# Altium PCB 2224_BuzzerWireGame.PcbDoc (part 1 of 2)
Units mm, origin at the board's own origin, x right, y up, seen from the top; angles counter-clockwise.
Board outline 125.2 x 82 mm, 2 copper layers (Top Layer, Bottom Layer), stack 1.586 mm thick; 102 components, 84 nets, 371 pads, 115 vias.
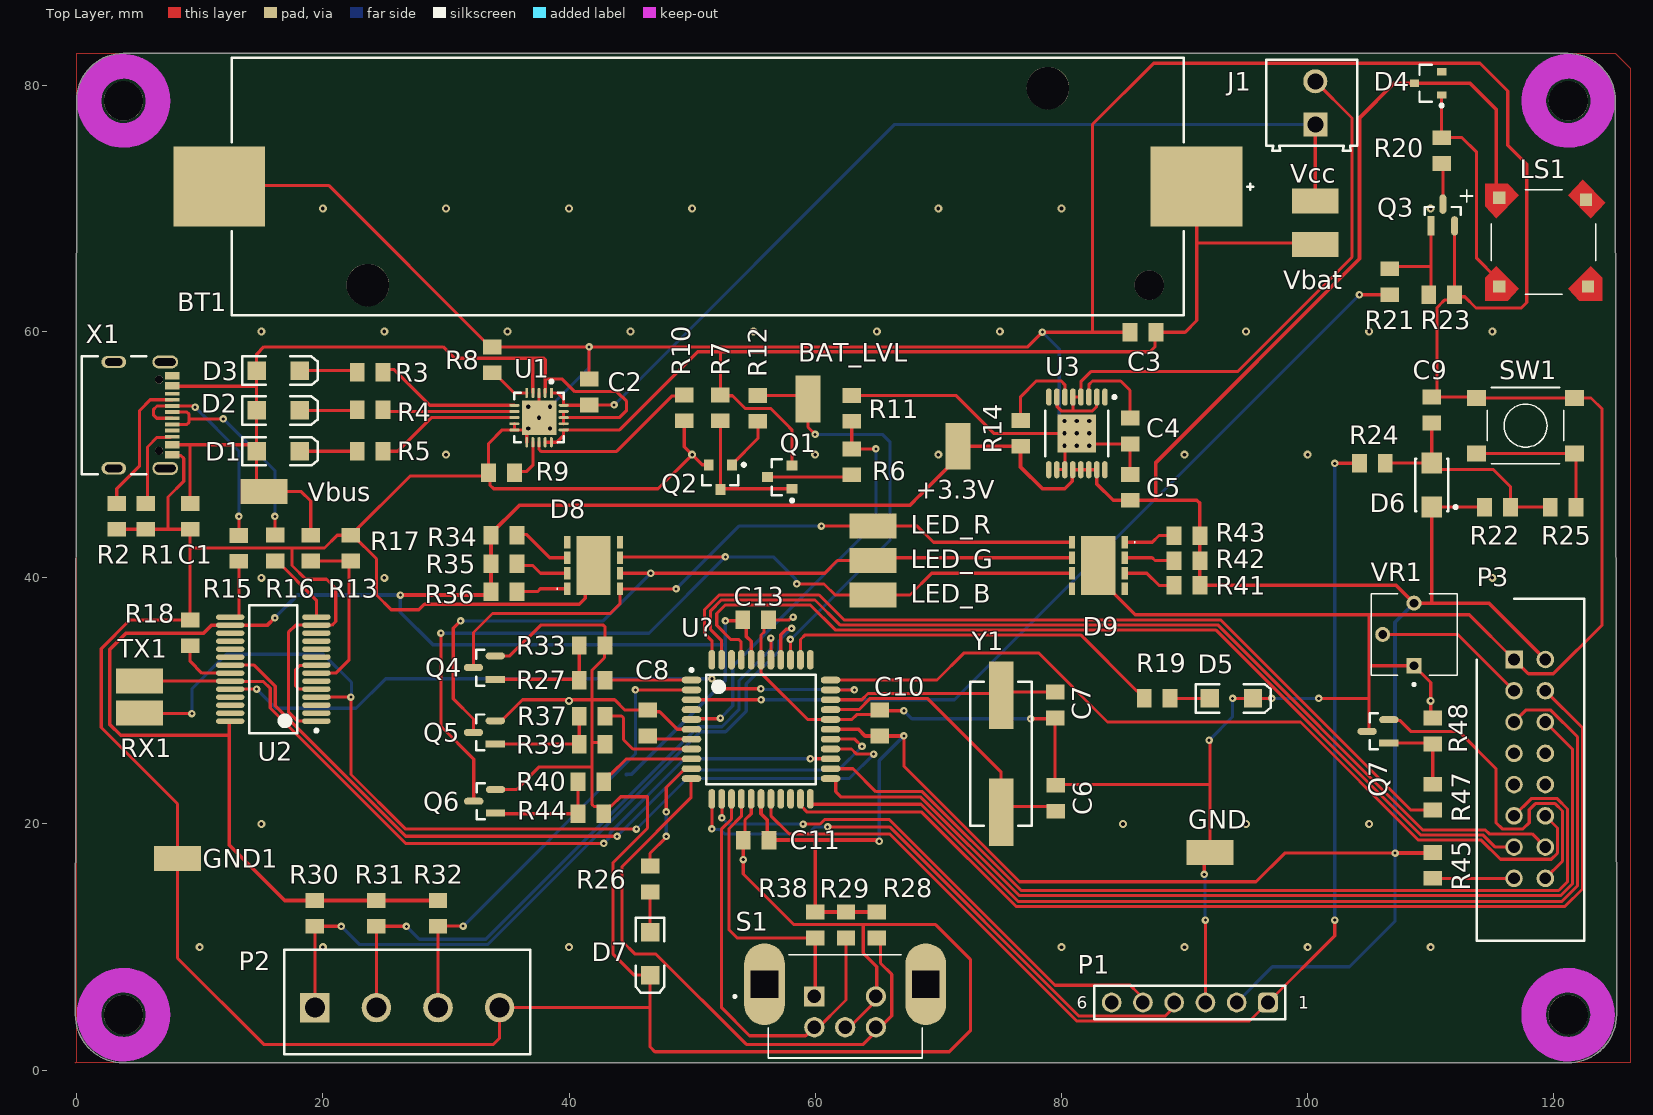
[diagram p0: Top Layer view]
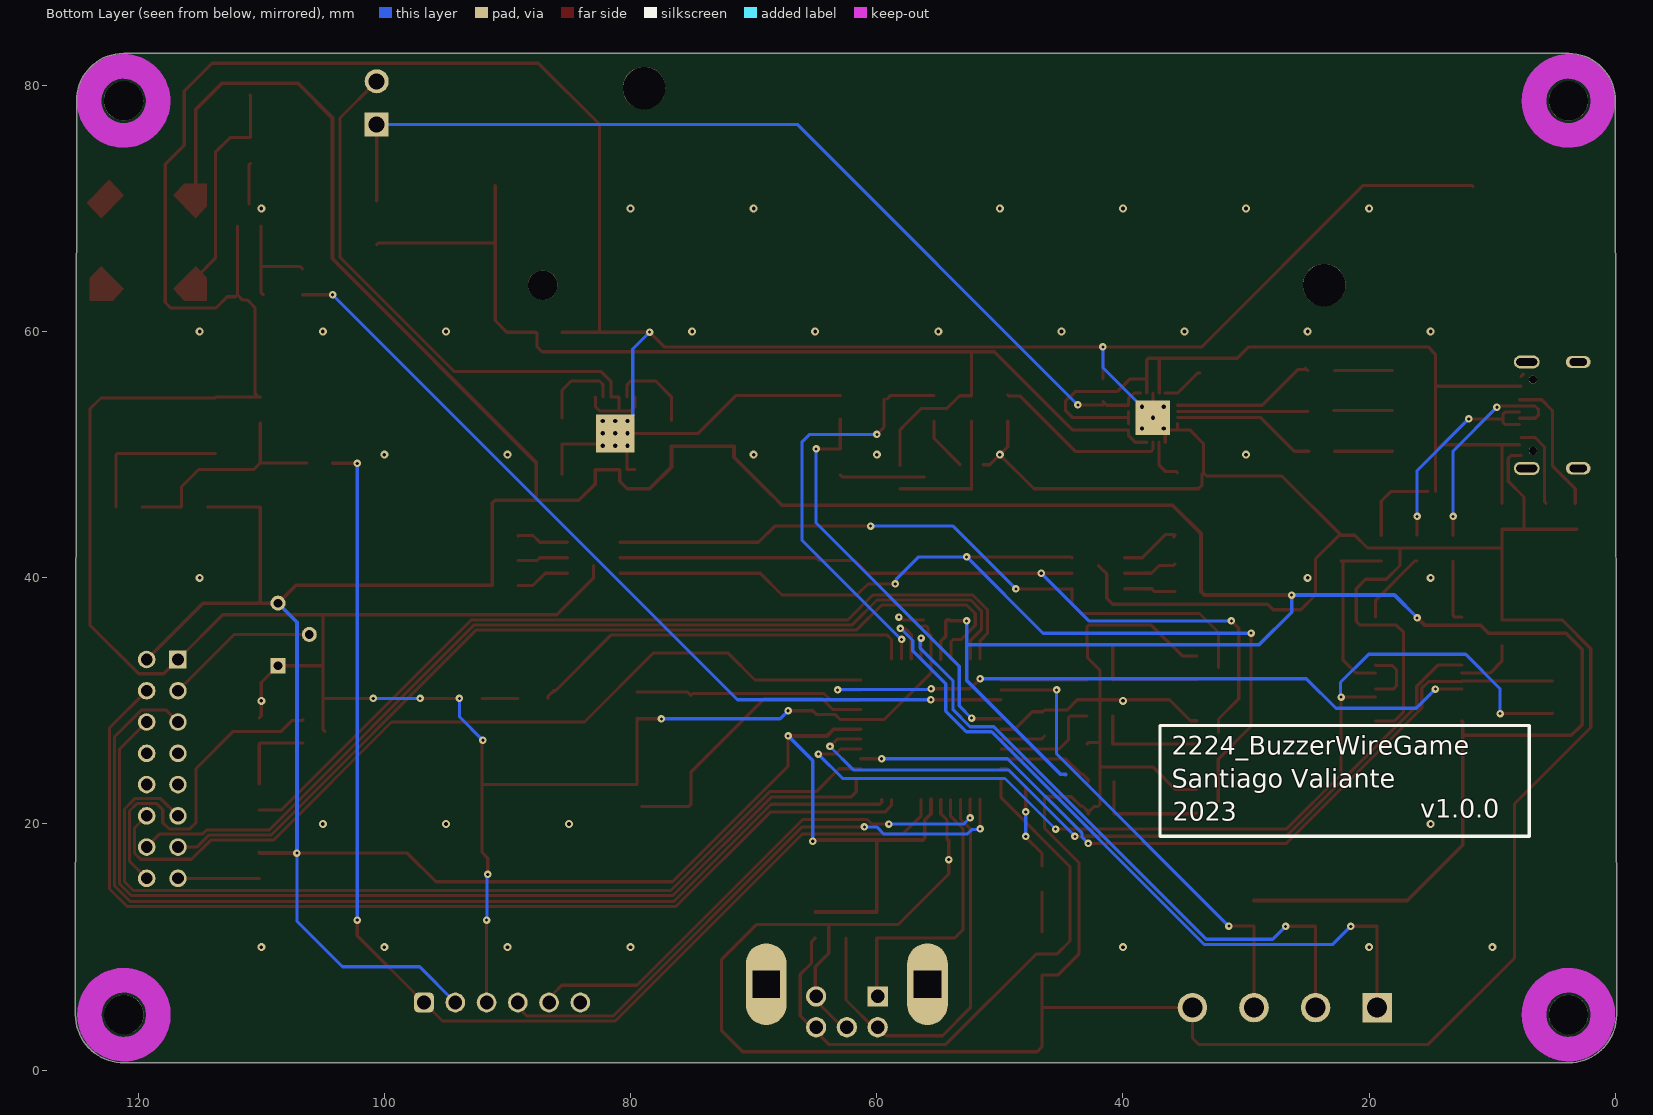
[diagram p1: Bottom Layer view, seen from below]

## Layer stack, top to bottom
Top Solder: solder mask 0.0102, Solder Resist, Dk 3.5
Top Layer: signal copper 0.018
Dielectric1: core 1.55, FR-4, Dk 4.8
Bottom Layer: signal copper 0.018
Bottom Solder: solder mask 0.0102, Solder Resist, Dk 3.5

## Board outline
3.81,0.6 cw(c3.81,4.51) -0.1,4.51 0,78.74 cw(c3.835,78.765) 3.81,82.6 121.179,82.6 cw(c121.16,78.76) 125,78.74 125.1,4.526 cw(c121.158,4.542) 121.142,0.6

## Design rules (kind name [scope] priority, off if disabled: settings)
BoardOutlineClearance [All] p1: gap=0.25 ignorepadtopadclearanceinfootprint=FALSE except(0: Arc-SplitContinuation Track-SplitContinuation SMDPad-SplitContinuation THPad-SplitContinuation Via-SplitContinuation Fill-SplitContinuation Poly-SplitContinuation Region-SplitContinuation Text-SplitContinuation)
Clearance Clearance-xPP-xTP-xTT [All] p1: gap=0.151 ignorepadtopadclearanceinfootprint=FALSE
ComponentClearance [All] p1: gap=0.25 collisioncheckmode=3 verticalgap=0.25 showdistances=FALSE
DiffPairsRouting [All] p1: maxlimit=0.25 minlimit=0.25 mostfreqgap=0.25 toplayer_minwidth=0.381 toplayer_maxwidth=0.381 toplayer_prefwidth=0.381 bottomlayer_minwidth=0.381 bottomlayer_maxwidth=0.381 bottomlayer_prefwidth=0.381 maxuncoupledlength=12.5
Height [All] p1: minheight=0 maxheight=25 prefheight=12.5
HoleSize HoleSize-PTH [All] p1: absolutevalues=TRUE maxlimit=10 minlimit=0.25 maxpercent=80.000 minpercent=20.000
HoleToHoleClearance [All] p1: gap=0.35 allowstackedmicrovias=TRUE
MinimumAnnularRing "Minimum IAR  >0.45mm" [((ObjectKind = 'Pad') OR (ObjectKind = 'Via')) And (Layer = 'MultiLayer') And (HoleDiameter > AsMM(0.45))] p1: minimumring=0.175 // minimum inner annular ring for pads > 0.45mm finished hole size
MinimumAnnularRing "Minimum IAR <=0.45mm" [((ObjectKind = 'Pad') OR (ObjectKind = 'Via')) And (Layer = 'MultiLayer') And (HoleDiameter <= AsMM(0.45))] p2: minimumring=0.175 // minimum inner annular ring for pads <= 0.45mm finished hole size
MinimumSolderMaskSliver [All] p1: minsoldermaskwidth=0.08
PasteMaskExpansion [All] p1: expansion=-0.025
PlaneClearance PlaneClearance-IPI [All] p1: clearance=0.25
PlaneConnect [All] p1: planeconnectstyle=Relief reliefexpansion=0.175 reliefentries=4 reliefconductorwidth=0.2 reliefairgap=0.2
PolygonConnect PolygonConnect-xTW [All] p1: connectstyle=Relief reliefconductorwidth=0.2 reliefentries=4 polygonreliefangle="90 Angle" airgapwidth=0.2
RoomDefinition Alimentation [InComponentClass('Alimentation')] p1: confinementstyle=ConfineIn formatcopy=TRUE lockcomponents=FALSE outline -219.71,-227.838 388.112,-227.838 388.112,287.02 -219.71,287.02
RoomDefinition uC_IO [InComponentClass('uC_IO')] p2: confinementstyle=ConfineIn formatcopy=TRUE lockcomponents=FALSE outline -250,-250 387.604,-250 387.604,279.654 -250,279.654
RoutingCorners [All] p1: cornerstyle=45-Degree minsetback=2.5 maxsetback=2.5
RoutingVias RoutingViasES [All] p1: holewidth=0.25 width=0.61 viastyle="Through Hole" minholewidth=0.25 minwidth=0.61 maxholewidth=0.45 maxwidth=0.8 // finishet hole size <= 0.45mm
SilkToSilkClearance [All] p1: silktosilkclearance=0.2
SilkToSolderMaskClearance SilkscreenOverComponentPads [IsPad] p1: minsilkscreentomaskgap=0 clearancetoexposedcopper=TRUE
SolderMaskExpansion [All] p1: expansion=0 istentingtop=FALSE
UnRoutedNet [All] p1: checkbadconnections=TRUE
Width Width-xTW [All] p1: maxlimit=1.5 minlimit=0.254 preferedwidth=0.254 minimp=50.000000 maximp=50.000000 favimp=50.000000
17 further rules are at their usual default settings.

## Classes and differential pairs
component class uC_IO: C6 C7 C8 C9 C10 C11 C13 D4 D5 D6 D7 D8 D9 LED_B LED_G LED_R LS1 P1 P2 P3 Q3 Q4 Q5 Q6 Q7 R19 R20 R21 R22 R23 R24 R25 R26 R27 R28 R29 R30 R31 R32 R33 R34 R35 R36 R37 R38 R39 R40 R41 R42 R43 R44 R45 R47 R48 S1 SW1 U? VR1 Y1
component class Alimentation: +3.3V BAT_LVL BT1 C1 C2 C3 C4 C5 D1 D2 D3 GND GND1 J1 Q1 Q2 R1 R2 R3 R4 R5 R6 R7 R8 R9 R10 R11 R12 R13 R14 R15 R16 R17 R18 RX1 TX1 U1 U2 U3 Vbat Vbus Vcc X1

## Components (designator, comment, footprint, x,y, rotation, side; value= is the part's Value field where it differs from the comment)
+3.3V "3.3V" KSTN-5019_V 71.602,50.682 r90 top
BAT_LVL "Vbat" KSTN-5019_V 59.41,54.529 r270 top
BT1 "1042P" FP-1042P-MFG 51.276,71.781 r0 top
C1 "4,7uF" CAP_0805 9.222,44.989 r90 top
C2 "4,7uF" CAP_0805 41.63,55.09 r270 top
C3 "4,7uF" CAP_0805 86.622,59.95 r0 top
C4 "4.7uF, 35V" CAP_0805 85.572,51.922 r270 top
C5 "6.8uF, 10V" CAP_0805 85.572,47.35 r90 top
C6 "22pF, 10V" CAP_0805 79.539,22.089 r270 top value=22pF
C7 "22pF, 10V" CAP_0805 79.482,29.662 r90 top value=22pF
C8 "10uF, 10V" CAP_0805 46.38,28.2 r90 top value=10uF
C9 "100nF, 50V" CAP_0805 110.084,53.629 r90 top
C10 "100nF, 50V" CAP_0805 65.252,28.2 r90 top
C11 "100nF, 50V" CAP_0805 55.204,18.694 r180 top
C13 "100nF, 50V" CAP_0805 55.16,36.582 r0 top
D1 "LED R" 3.2X1.6X1.1 16.373,50.284 r0 top
D2 "LED G" 3.2X1.6X1.1 16.373,53.593 r0 top
D3 "LED B" 3.2X1.6X1.1 16.373,56.828 r0 top
D4 "BAS16" INF-SOT23_L 109.786,80.164 r180 top
D5 "LED R" 3.2X1.6X1.1 93.811,30.201 r0 top
D6 "SS14-E3/5AT" VISH-DO-214AC-2_V 110.084,47.533 r270 top
D7 "LED G" 3.2X1.6X1.1 46.58,9.475 r270 top
D8 "XMLDCL-00-R250-00C5AAA02" XMLDCL00R25000C5AAA02 42,41 r180 top
D9 "XMLDCL-00-R250-00C5AAA02" XMLDCL00R25000C5AAA02 83,41 r0 top
GND "Vbat" KSTN-5019_V 92.061,17.684 r0 top
GND1 "Vbat" KSTN-5019_V 8.2,17.2 r0 top
J1 "691214110002" 691214110002 100.322,78.584 r90 top
LED_B "Vbat" KSTN-5019_V 64.7,38.6 r180 top
LED_G "Vbat" KSTN-5019_V 64.7,41.4 r180 top
LED_R "Vbat" KSTN-5019_V 64.7,44.2 r180 top
LS1 "Speaker" XDCR_SMTB-0827-TW-R 119.17,67.266 r0 top
P1 "61300611121" 61300611121 90.43,5.5 r180 top
P2 "691311700004" 691311700004 26.858,5.536 r0 top
P3 "Header 16" SHDR16W77P254_2X8_2764X859X1004P 116.767,33.364 r270 top
Q1 "NVR1P02T1G" ONSC-SOT-23-3-318-08_V 57.124,48.179 r180 top
Q2 "BSS138LT1G" ONSC-SOT-23-3-318-08_V 52.298,48.179 r270 top
Q3 "IRLML2402" FP-Micro3-IPC_B 110.986,69.471 r90 top
Q4 "IRLML2402" FP-Micro3-IPC_B 33.125,32.706 r180 top
Q5 "IRLML2402" FP-Micro3-IPC_B 33.125,27.434 r180 top
Q6 "IRLML2402" FP-Micro3-IPC_B 33.145,21.85 r180 top
Q7 "IRLML2402" FP-Micro3-IPC_B 105.714,27.522 r180 top
R1 "5K1" RES_0805 5.626,44.994 r90 top
R2 "5K1" RES_0805 3.257,44.994 r90 top
R3 "360R" RES_0805 23.85,56.704 r0 top
R4 "360R" RES_0805 23.85,53.664 r180 top
R5 "620R" RES_0805 23.85,50.284 r0 top
R6 "39K" RES_0805 62.966,49.415 r270 top
R7 "36K" RES_0805 52.298,53.801 r90 top value=39K
R8 "10K" RES_0805 33.756,57.698 r270 top value=10k
R9 "5K6" RES_0805 34.516,48.52 r0 top
R10 "2K2" RES_0805 49.362,53.801 r90 top
R11 "39K" RES_0805 62.966,53.767 r270 top
R12 "270R" RES_0805 55.346,53.767 r270 top value=270
R13 "10K" RES_0805 19.024,42.408 r90 top value=10k
R14 "100k" RES_0805 76.682,51.732 r90 top
R15 "24R" RES_0805 13.182,42.39 r270 top
R16 "24R" RES_0805 16.132,42.424 r270 top
R17 "20K" RES_0805 22.284,42.408 r270 top value=20k
R18 "1K" RES_0805 9.222,35.532 r270 top value=1k
R19 "620R" RES_0805 87.771,30.201 r180 top
R20 "150R" RES_0805 110.886,74.705 r270 top value=0R
R21 "200R" RES_0805 106.654,64.048 r90 top
R22 "10k" RES_0805 115.418,45.743 r180 top
R23 "100K" RES_0805 110.886,62.998 r0 top
R24 "1k" RES_0805 105.258,49.311 r180 top
R25 "100R" RES_0805 120.752,45.743 r180 top
R26 "360R" RES_0805 46.58,15.529 r90 top
R27 "200R" RES_0805 41.884,31.692 r0 top
R28 "10K" RES_0805 65,11.8 r90 top
R29 "10K" RES_0805 62.5,11.8 r90 top
R30 "10K" RES_0805 19.358,12.74 r90 top
R31 "10K" RES_0805 24.358,12.74 r90 top
R32 "10K" RES_0805 29.358,12.74 r90 top
R33 "100K" RES_0805 41.884,34.5 r0 top
R34 "2R" RES_0805 34.716,43.44 r0 top
R35 "3.3R" RES_0805 34.716,41.13 r0 top
R36 "6R" RES_0805 34.716,38.88 r0 top
R37 "200R" RES_0805 41.884,28.77 r0 top
R38 "10K" RES_0805 60,11.8 r90 top
R39 "100K" RES_0805 41.884,26.484 r0 top
R40 "200R" RES_0805 41.771,23.449 r0 top
R41 "2R" RES_0805 90.198,39.388 r180 top
R42 "3.3R" RES_0805 90.198,41.4 r180 top
R43 "6R" RES_0805 90.198,43.432 r180 top
R44 "100K" RES_0805 41.771,20.834 r0 top
R45 "15R" RES_0805 110.163,16.634 r90 top
R47 "200R" RES_0805 110.163,22.188 r270 top
R48 "100K" RES_0805 110.163,27.556 r90 top
RX1 "Vbat" KSTN-5019_V 5.118,29.007 r0 top
S1 "PEC12R-2220F-S0024" XDCR_PEC12R-2220F-S0024 62.43,3.491 r0 top
SW1 "430182043816" 430182043816 117.704,52.359 r0 top
TX1 "Vbat" KSTN-5019_V 5.118,31.607 r180 top
U1 "MCP73871T-2CCI/ML" MICROCHIP_C04V2 37.566,53.013 r270 top
U2 "CY7C64225-28PVXCT" CYP-PVX28_M 15.976,32.582 r180 top
U3 "MAX1793EUE33+" TSOP65P640X110_HS-17N 81.251,51.732 r270 top
U? "PIC32MX130F064D-I/PT" MCHP-TQFP-PT44_N 55.6,27.692 r0 top
Vbat "Vbat" KSTN-5019_V 100.622,67.062 r0 top
Vbus "Vbat" KSTN-5019_V 15.214,46.996 r0 top (schematic designator Vin)
Vcc "Vbat" KSTN-5019_V 100.622,70.618 r180 top
VR1 "3362P-1-102LF" TRIM_3362P-1-102LF 108.639,35.396 r90 top
X1 "U262-161N-4BVC11" GCT_USB4105-GF-A 3.02,53.21 r270 top
Y1 "8MHz, 12p" FOX-FOXSDLF160-20_V 75.1,25.7 r90 top value="8M, 12p"

## Footprints (in the part's own frame and the unit in brackets; to place one, negate y for a bottom-side part, rotate by r counter-clockwise, add the part's x,y. Pads: shape width x height; smd on the part's side, far side on the other; paste and mask are expansions set on the pad)
3.2X1.6X1.1 [mm] "SMT LED; 2 Flat Leads"
  rect 1.5x1.5 smd: 1(-1.75,0) 2(1.75,0)
  silkscreen extent -2.9,-1.15 3.2,1.15
61300611121 [mm]
  rrect40% 1.6x1.6 hole 1.1: 1(-6.35,0)
  round 1.6 hole 1.1: 2(-3.81,0) 3(-1.27,0) 4(1.27,0) 5(3.81,0) 6(6.35,0)
  silkscreen extent -7.77,-1.35 7.77,1.34, body extent -7.62,-1.27 7.62,1.27, height 8.57
430182043816 [mm] "6*6mm vertical type, SMD, height 4.3mm, black actuator, 160gf, T&R"
  rect 1.55x1.3 smd: 1(-3.975,2.25) 2(-3.975,-2.25) 3(3.975,2.25) 4(3.975,-2.25)
  silkscreen extent -3.1,-3.1 3.1,3.1, body extent -4.5,-3.1 4.5,3.1, height 4.29
691214110002 [mm] "3.50 mm Horizontal Entry Modular, 2p"
  rect 1.95x1.95 hole 1.3: 1(-1.75,-0.3)
  round 1.95 hole 1.3: 2(1.75,-0.3)
  silkscreen extent -3.9,-3.7 3.5,3.7, body extent -3.95,-3.7 3.5,3.7, height 8.55
691311700004 [mm] "5.00mm - Open Vertical PCB Header - 04p"
  rect 2.4x2.4 hole 1.6: 1(-7.5,-0.45)
  round 2.4 hole 1.6: 2(-2.5,-0.45) 3(2.5,-0.45) 4(7.5,-0.45)
  silkscreen extent -10,-4.25 10,4.25, body extent -10,-4.25 10,4.25, height 12.1
CAP_0805 [mm]
  rect 1.2x1.5 smd: 1(-1.05,0) 2(1.05,0)
  body extent -1,-0.63 1,0.63, height 0.81
CYP-PVX28_M [mm] "SOP, 28-Leads, Body 10.2x5.3mm, Pitch 0.65mm, IPC Low Density"
  oval 2.3x0.45 smd: 1(-3.5,4.225) 2(-3.5,3.575) 3(-3.5,2.925) 4(-3.5,2.275) 5(-3.5,1.625) 6(-3.5,0.975) 7(-3.5,0.325) 8(-3.5,-0.325) 9(-3.5,-0.975) 10(-3.5,-1.625) 11(-3.5,-2.275) 12(-3.5,-2.925) 13(-3.5,-3.575) 14(-3.5,-4.225) 15(3.5,-4.225) 16(3.5,-3.575) 17(3.5,-2.925) 18(3.5,-2.275) 19(3.5,-1.625) 20(3.5,-0.975) 21(3.5,-0.325) 22(3.5,0.325) 23(3.5,0.975) 24(3.5,1.625) 25(3.5,2.275) 26(3.5,2.925) 27(3.5,3.575) 28(3.5,4.225)
  silkscreen extent -3.63,-5.2 1.95,5.2, body extent -2.8,-5.2 2.8,5.2, height 2
FOX-FOXSDLF160-20_V [mm] "SMD, 2-Leads, Body 5x11.7mm, Height 4.5mm"
  rect 5.5x2 smd: 1(-4.75,0) 2(4.75,0)
  silkscreen extent -5.85,-2.5 5.85,2.5, body extent -5.85,-2.5 5.85,2.5, height 4.5
FP-1042P-MFG [mil]
  rect 294x255 smd paste+0 mask+0: 1(-1562.5,0) 2(1562.5,0)
  round 135.83 hole 135.83 unplated paste-39370.1 mask+0: ""(-1087.5,-315) ""(1087.5,315)
  round 94 hole 94 unplated paste-39370.1 mask+0: ""(1411.5,-315)
  silkscreen extent -1522,-412 1745,412, body extent -1713,-415 1713,415, height 10
FP-Micro3-IPC_B [mm]
  rect 1.574x0.572 smd paste+0 mask+0: 1(-0.885,0.95)
  rrect100% 1.574x0.572 smd paste+0 mask+0: 2(-0.885,-0.95) 3(0.885,0)
  silkscreen extent 0,-1.46 0.65,1.46, body extent -1.92,-1.71 1.92,1.71, height 0.25
GCT_USB4105-GF-A [mm]
  rect 0.6x1.15 smd: A1B12(-3.2,4.755) A4B9(-2.4,4.755) B1A12(3.2,4.755) B4A9(2.4,4.755)
  rect 0.3x1.15 smd: A5(-1.25,4.755) A6(-0.25,4.755) A7(0.25,4.755) A8(1.25,4.755) B5(1.75,4.755) B6(0.75,4.755) B7(-0.75,4.755) B8(-1.75,4.755)
  oval 1.05x2.1 hole 0.6 slot 1.7 at 90 deg: S1(-4.32,4.18) S4(4.32,4.18)
  oval 1x2 hole 0.6 slot 1.4 at 90 deg: S2(-4.32,0) S3(4.32,0)
  round 0.65 hole 0.65 unplated: ""(-2.89,3.68) ""(2.89,3.68)
  silkscreen extent -4.79,-2.6 4.79,2.65, body extent -4.47,-2.59 4.47,5.11, height 3.26
INF-SOT23_L [mm] "SOT23, 3-Leads, Body 2.9x1.3 mm, Pitch 0.95 mm, IPC High Density"
  rect 0.75x0.6 smd: 1(-1.1,0.95) 2(-1.1,-0.95) 3(1.1,0)
  silkscreen extent -1.23,-1.5 0.7,1.92, body extent -0.7,-1.5 0.7,1.5, height 1.1
KSTN-5019_V [mm] "Test Point, 1-Leads, Body 3.81x2.03mm"
  rect 3.8x2.03 smd: 1(0,0)
  body extent -1.9,-1.01 1.9,1.02, height 2.29
MCHP-TQFP-PT44_N [mm] "QFN, 44-Leads, Body 10x10mm, Pitch 0.8mm, IPC Medium Density"
  oval 1.6x0.55 smd: 1(-5.65,4) 2(-5.65,3.2) 3(-5.65,2.4) 4(-5.65,1.6) 5(-5.65,0.8) 6(-5.65,0) 7(-5.65,-0.8) 8(-5.65,-1.6) 9(-5.65,-2.4) 10(-5.65,-3.2) 11(-5.65,-4) 23(5.65,-4) 24(5.65,-3.2) 25(5.65,-2.4) 26(5.65,-1.6) 27(5.65,-0.8) 28(5.65,0) 29(5.65,0.8) 30(5.65,1.6) 31(5.65,2.4) 32(5.65,3.2) 33(5.65,4)
  oval 0.55x1.6 smd: 12(-4,-5.65) 13(-3.2,-5.65) 14(-2.4,-5.65) 15(-1.6,-5.65) 16(-0.8,-5.65) 17(0,-5.65) 18(0.8,-5.65) 19(1.6,-5.65) 20(2.4,-5.65) 21(3.2,-5.65) 22(4,-5.65) 34(4,5.65) 35(3.2,5.65) 36(2.4,5.65) 37(1.6,5.65) 38(0.8,5.65) 39(0,5.65) 40(-0.8,5.65) 41(-1.6,5.65) 42(-2.4,5.65) 43(-3.2,5.65) 44(-4,5.65)
  silkscreen extent -5.77,-4.45 4.45,4.95, body extent -5,-5 5,5, height 1.2
MICROCHIP_C04V2 [mm]
  rect 0.829x0.239 smd paste+0 mask+0: 1(-2,1)
  rrect100% 0.829x0.239 smd paste+0 mask+0: 2(-2,0.5) 3(-2,0) 4(-2,-0.5) 5(-2,-1) 11(2,-1) 12(2,-0.5) 13(2,0) 14(2,0.5) 15(2,1)
  rrect100% 0.239x0.829 smd paste+0 mask+0: 6(-1,-2) 7(-0.5,-2) 8(0,-2) 9(0.5,-2) 10(1,-2) 16(1,2) 17(0.5,2) 18(0,2) 19(-0.5,2) 20(-1,2)
  rect 2.8x2.8 smd paste-1000 mask+0: 21(0,0)
  rect 2.8x2.8 smd far side paste-1000 mask+0: 21(0,0)
  silkscreen extent -3.05,-2 2,2, body extent -2,-2 2,2, height 1
ONSC-SOT-23-3-318-08_V [mm] "SOT23, 3-Leads, Body 2.92x1.3mm, Pitch 0.95mm"
  rect 0.9x0.8 smd: 1(-1,0.95) 2(-1,-0.95) 3(1,0)
  silkscreen extent -1.13,-1.46 0.65,2.02, body extent -0.65,-1.46 0.65,1.46, height 1.11
RES_0805 [mm]
  rect 1.2x1.5 smd: 1(-1.05,0) 2(1.05,0)
  body extent -1,-0.63 1,0.63, height 0.52
SHDR16W77P254_2X8_2764X859X1004P [mm]
  rect 1.425x1.425 / inner round 1.425 / far side rect 1.425x1.425 hole 0.95: 1(0,0)
  round 1.425 hole 0.95: 2(0,2.54) 3(2.54,0) 4(2.54,2.54) 5(5.08,0) 6(5.08,2.54) 7(7.62,0) 8(7.62,2.54) 9(10.16,0) 10(10.16,2.54) 11(12.7,0) 12(12.7,2.54) 13(15.24,0) 14(15.24,2.54) 15(17.78,0) 16(17.78,2.54)
  silkscreen extent -4.93,-3.03 22.84,5.7, body extent -4.93,-3.03 22.71,5.57, height 10.04
TRIM_3362P-1-102LF [mm]
  rect 1.222x1.222 hole 0.714: 1(-2.54,0)
  round 1.222 hole 0.714: 2(0,2.54) 3(2.54,0)
  silkscreen extent -4.16,-3.53 3.3,3.47, body extent -1.55,-0.8 1.55,0.8, height 0.65
TSOP65P640X110_HS-17N [mm] "TSOP, 16-Leads, Body 5.00x4.40mm, Pitch 0.65mm, Thermal Pad 3.10x3.10mm, IPC Medium Density"
  oval 1.4x0.45 smd: 1(-2.95,2.275) 2(-2.95,1.625) 3(-2.95,0.975) 4(-2.95,0.325) 5(-2.95,-0.325) 6(-2.95,-0.975) 7(-2.95,-1.625) 8(-2.95,-2.275) 9(2.95,-2.275) 10(2.95,-1.625) 11(2.95,-0.975) 12(2.95,-0.325) 13(2.95,0.325) 14(2.95,0.975) 15(2.95,1.625) 16(2.95,2.275)
  rect 3.1x3.1 smd: 10(0,0)
  rect 3.1x3.1 smd far side: 10(0,0)
  silkscreen extent -3.07,-2.55 1.85,3.17, body extent -3.19,-2.55 3.19,2.55, height 1.1
VISH-DO-214AC-2_V [mm] "SMA, 2-Leads, Body 4.245x2.665mm, Height 2.29mm"
  rect 1.7x1.68 smd: 1(-1.79,0) 2(1.79,0)
  silkscreen extent -2.12,-1.33 2.12,2.06, body extent -2.57,-1.33 2.57,1.33, height 2.29
XDCR_PEC12R-2220F-S0024 [mm]
  rect 1.65x1.65 hole 1.1: 1(-2.5,2.5)
  round 1.65 hole 1.1: 2(2.5,2.5) A(-2.5,0) B(2.5,0) C(0,0)
  oval 3.316x6.632 hole 2.2 square: S1(-6.55,3.5) S2(6.55,3.5)
  silkscreen extent -9.06,-2.5 6.25,5.9, body extent -6.41,-16.19 6.41,6.21, height 16.7
XDCR_SMTB-0827-TW-R [mm]
  rect 1x1 smd paste-1 mask+0: 2(3.45,3.45) 4(3.6,-3.6) N(-3.6,-3.6) P(-3.6,3.6)
  Top Layer region: -2.009,-3.798 -2.912,-4.75 -4.75,-4.75 -4.75,-2.912 -3.848,-1.959
  Top Layer region: 5,3.212 3.848,1.959 2.009,3.798 3.162,5.05
  Top Layer region: 4.75,-2.912 4.75,-4.75 2.912,-4.75 2.009,-3.798 3.848,-1.959
  Top Layer region: -2.009,3.798 -3.848,1.959 -4.75,2.912 -4.75,4.75 -2.912,4.75
  silkscreen extent -6.75,-4.25 4.25,4.25, body extent -4.25,-4.25 4.25,4.25, height 3.06
XMLDCL00R25000C5AAA02 [mm]
  rect 0.5x1.01 smd: 1(2.14,1.89) 2(2.14,0.63) 3(2.14,-0.63) 4(2.14,-1.89) 5(-2.14,-1.89) 6(-2.14,-0.63) 7(-2.14,0.63) 8(-2.14,1.89)
  rect 2.78x4.78 smd: 9(0,0)
  silkscreen extent 2.9,1.84 3,1.94, body extent -10,-3.38 10,3.38, height 5.8

## Part data
+3.3V BAT_LVL GND GND1 LED_B LED_G LED_R RX1 TX1 Vbat Vbus Vcc: library part CMP-1672-00008-1, "Test Point, 1 Position SMD, RoHS, Tape and Reel", Package Quantity=1000, ComponentLink1Description="Manufacturer URL", ComponentLink1URL=http://www.keyelco.com/, ComponentLink2Description=Datasheet, ComponentLink2URL=http://www.keyelco.com/product-pdf.cfm?p=1357, Contact Plating=Silver, DatasheetVersion=03/2014, Mount="Surface Mount", Mounting Technology="Surface Mount", PackageDescription="1-Pin Surface Mount Device, Body 3.81 x 2.03 mm", PackageReference=5019, Packaging="Tape and Reel", Pins=1, RoHSCompliant=True
BT1: library part CMP-19636-000019-1, "BATTERY HOLDER 18650 SMD TAB", Max Operating Temperature=145°C, Min Operating Temperature=-50°C, Package Quantity=200, Lead Free="Lead Free", Mount="Surface Mount", Number of Cells=1, Packaging=Tray, Termination=SMD/SMT
C1 C2 C3: library part Cap, "Capacitor", LatestRevisionDate=17-Jul-2002, LatestRevisionNote="Re-released for DXP Platform.", PackageDescription="Radial Cap, Thru-Hole; 2 Leads; 0.3 in Pin Spacing", PackageReference=RAD-0.3, Published=8-Jun-2000, Publisher="Altium Limited"
C4: library part CMP-08246-002735-1, "Multilayer Ceramic Capacitors 4.7μF ±10% 35V X7R SMD 0805", Capacitance=4.7uF, Case Code (Imperial)=0805, Case Code (Metric)=2012, Dielectric=X7R, Dielectric Material=Ceramic, Max Operating Temperature=125°C, Min Operating Temperature=-55°C, Package Quantity=2000, Tolerance=10%, Voltage Rating=35V, Case/Package=0805, Construction=Flat, Depth=1.25mm, Height=1.25mm, Lead Free="Lead Free", Length=2mm, Mount="Surface Mount", Packaging="Tape and Reel", Radiation Hardening=No, REACH SVHC="No SVHC", RoHS Compliant=Yes, Series=C, Termination=SMD/SMT, Thickness=0.057inch, Voltage Rating (DC)=35V, Weight=0.000194oz, Width=0.049inch
C5: library part CMP-08246-000118-1, "Cap Ceramic 6.8uF 10V X5R 20% Pad SMD 0805 +85°C Automotive T/R", Capacitance=6.8uF, Case Code (Imperial)=0805, Case Code (Metric)=2012, Dielectric=X5R, Max Operating Temperature=85°C, Min Operating Temperature=-55°C, Package Quantity=2000, Ratings=AEC-Q200, Tolerance=20%, Voltage Rating=10V, Case/Package=0805, Height=1.25mm, Length=0.079inch, Mount="Surface Mount", Packaging="Tape and Reel", Thickness=0.057inch, Voltage Rating (DC)=10V, Weight=0.000194oz, Width=0.049inch
C6 C7: library part CMP-1036-01211-1, "CAP 22pF 10V ±10% 0805 (2012 Metric) Thickness 0.75mm SMD", Case-EIA=0805, Case-Metric=2012, Rated Voltage="10 V", Tolerance=Â±10%, Max Thickness="0.75 mm", Technology=SMT
C8: library part CMP-2007-03243-2, "CAP CER 10UF 10V X5R 0805", 3DS Part Number=220-00001, Capacitance=10uF, Manufacturer=Kemet, Manufacturer Part Number=C0805C106K8PACTU, Package=C0805C-DG, Temperature="-55°C to +85°C", Temperature Characteristic=X5R, Temperature Coefficient=15%, Temperature Range High=+85°C, Temperature Range Low=-55°C, Tolerance=10%, Voltage=10V, Automotive=No, Category=Cap, ComponentLink2Description=Datasheet, ComponentLink2URL=https://content.kemet.com/datasheets/KEM_C1006_X5R_SMD.pdf, Device Class L1="Passive Components", Device Class L2=Capacitors, Device Class L3="Ceramic Capacitors", Digikey Description="CAP CER 10UF 10V X5R 0805", Height=1.4mm, Ipc Land Pattern Name=CAPC200125X125, Lead Free=Yes, Material=Ceramic, Mouser Description="CAP CER 10UF 10V X5R 0805", Octopart=https://octopart.com/c0805c106k8pactu-kemet-98697, RoHS=TRUE, Voltage Rating=10V
C9 C10 C11 C13: library part 885012207098, "WCAP-CSGP General Purpose Ceramic Capacitors, size 0805, 100nF, +/-10%, 50VDC", Capacitance=100nF, Capacitance Tolerance=+/-10%, Isolation Resistance=>=5GOhm, Operating Temperature="-55 to +125degC", Rated Voltage=50VDC, Supplier Part Number 1=732-8080-1-ND, Ceramic Type=X7R, ComponentLink1Description=Manufacturer, ComponentLink1URL=http://www.we-online.de, ComponentLink2Description=Datasheet, ComponentLink2URL=https://katalog.we-online.com/pbs/datasheet/885012207098.pdf, Dissipation Factor=#NAME?, Height="0.8mm +/-0.10mm", Mounting Technology=SMD, Packaging="Tape and Reel", Part Number=885012207098, Published Date="August 2019", Publisher="Wurth Elektronik", Size=0805, Supplier 1=Digi-Key, Supplier 2=Distrelec, Supplier Part Number 2=30067953, Technical Reference=X7R0805104K050DFCT10000
D1 D2 D3 D5 D7: library part LED2, "Typical RED, GREEN, YELLOW, AMBER GaAs LED", LatestRevisionDate=17-Jul-2002, LatestRevisionNote="Re-released for DXP Platform.", PackageDescription="SM LED; 2 Flat Leads", PackageReference=3.2X1.6X1.1, PackageVersion=Feb-2002, Published=8-Jun-2000, Publisher="Altium Limited"
D4: library part CMP-1176-00017-1, "Silicon Switching Diode, SOT23, Reel, Green", Manufacturer=Infineon, ComponentLink1Description="Manufacturer URL", ComponentLink1URL=http://www.infineon.com/, ComponentLink2Description=Datasheet, ComponentLink2URL=http://www.infineon.com/dgdl/bas16series.pdf?folderId=db3a30431400ef6801141b5844e103ea&fileId=db3a30431400ef6801141b93811b03ff, ComponentLink3Description="Package Specification", ComponentLink3URL=http://www.infineon.com/dgdl/SOT23-Package_Overview.pdf?folderId=db3a30431936bc4b0119532290053c66&fileId=db3a30431936bc4b0119533468123c85, Configuration=Single, Green=TRUE, IF (max)="250Â mA", IR (max)="100Â nA", Mounting Technology="Surface Mount", PackageDescription="3-Pin Small Outline Transistor Package, 1.3 x 2.9 mm Body, 0.95 mm Pitch", PackageReference=SOT23, PackageVersion=Apr-08, PartNumber=BAS16, trr (max)="4Â ns", VBR (min)="85Â V", VF (max)="1.25Â V", VR (max)="80Â V"
D6: library part CMP-0549-00004-1, "Schottky Barrier Rectifier, 40 V Maximum DC Blocking Voltage, -65 to 125 degC, 2-Pin SMA Case, RoHS", Manufacturer="Vishay Semiconductor", Operating Temperature="-65 to 125 degC", ComponentLink1Description="Manufacturer URL", ComponentLink1URL=http://www.vishay.com/, ComponentLink2Description=Datasheet, ComponentLink2URL=http://www.vishay.com/docs/88746/ss12.pdf, ComponentLink3Description="Package Specification", ComponentLink3URL=http://www.vishay.com/docs/88746/ss12.pdf, DatasheetVersion=12/17/2012, IF(AV)="1 A Max.", IFSM="40 A", Mounting Technology="Surface Mount", PackageDescription="2-Pin SMD, Body 4.245 x 2.665 mm, Height 2.29 mm", PackageReference=DO-214AC-2, PackageVersion=Dec-12, PartNumber=SS14-E3/5AT, RoHS=TRUE, VDC="40 V Max.", VRMS="28 V Max.", VRRM="40 V Max."
D8 D9: "High Power LEDs - Multi-Colour RGB, White 6000K LED", Manufacturer_Name=Wolfspeed, Mouser Part Number=941-XMLDCL0R25C5A02, Datasheet Link=https://eu.mouser.com/datasheet/2/723/XLamp_XMLDCL-2935899.pdf, Geometry.Height=3.15mm, Manufacturer_Part_Number=XMLDCL-00-R250-00C5AAA02, Mouser Price/Stock=https://www.mouser.co.uk/ProductDetail/Cree-LED/XMLDCL-00-R250-00C5AAA02?qs=Znm5pLBrcALryTgji8xmYQ%3D%3D
J1: library part CMP-1502-02464-1, "Serie 2141 - 3.50 mm Horizontal Entry Modular with Rising Cage Clamp WR-TBL, 2 pin", Manufacturer="Wurth Elektronik", Operating Temperature=-40to105degC, Datasheet URL=http://katalog.we-online.de/em/datasheet/6912141100xx.pdf, Manufacturer URL=http://www.we-online.de, Mounting Technology=THT, Package Reference=691214110002, Packaging=Box, Part Number=691214110002, Pin Number=2, Pitch=3.50mm, Publisher=WurthElektronik
LS1: "Loudspeaker", LatestRevisionDate=17-Jul-2002, LatestRevisionNote="Re-released for DXP Platform.", PackageReference=PIN2, Published=24-Mar-1999, Publisher="Altium Limited"
P1: library part CMP-1502-01070-1, "THT Vertical Pin Header WR-PHD, Pitch 2.54 mm, Single Row, 6 pins", Contact Resistance=20mOhm, Manufacturer="Wurth Elektronik", Operating Temperature=-40to105degC, Rated Current=3A, Withstanding Voltage=500VAC, Working Voltage=250VAC, Datasheet URL=https://katalog.we-online.de/em/datasheet/6130xx11121.pdf, Gender=Male, Manufacturer URL=http://www.we-online.de, Mounting Technology=THT, Orientation=Vertical, Package Reference=61300611121, Packaging=Bag, Part Number=61300611121, Pin Number=6, Pitch=2.54mm, Publisher=WurthElektronik, Row Number=Single
P2: library part CMP-1502-02028-1, "Serie 3117 - 5.00mm Open Vertical PCB Header WR-TBL, 4 pin", Manufacturer="Wurth Elektronik", Operating Temperature=-40to105degC, Datasheet URL=http://katalog.we-online.de/em/datasheet/6913117000xx.pdf, Gender=Male, Manufacturer URL=http://www.we-online.de, Mounting Technology=THT, Package Reference=691311700004, Packaging=Box, Part Number=691311700004, Pin Number=4, Pitch=5.00mm, Publisher=WurthElektronik
P3: "Header, 16-Pin", LatestRevisionDate=17-Jul-2002, LatestRevisionNote="Re-released for DXP Platform.", Publisher="Altium Limited"
Q1: library part CMP-1058-00745-1, "Power MOSFET, -20 V, -1 A, P-Channel, 3-Pin SOT-23, Pb-Free, Tape and Reel", Manufacturer="On Semiconductor", Package Type=SOT-23-3, Channel Polarity="P Channel", Ciss Typ (pF)=165, ComponentLink1Description="Manufacturer URL", ComponentLink1URL=http://www.onsemi.com/, ComponentLink2Description=Datasheet, ComponentLink2URL=http://www.onsemi.cn/pub_link/Collateral/NTR1P02T1-D.PDF, ComponentLink3Description="Package Specification", ComponentLink3URL=http://www.onsemi.cn/pub_link/Collateral/318-08.PDF, Configuration=Single, Coss Typ (pF)=110, Crss Typ (pF)=35, DatasheetVersion="Rev. 7", ID Max (A)=1, Mounting Technology="Surface Mount", PackageDescription="3-Pin Small Outline Transistor, Body 2.92 x 1.3 mm, Pitch 0.95 mm", PackageReference=SOT-23-3-318-08, PackageVersion="Rev. AP, 11/2009", Packing="Tape and Reel", PartNumber=NVR1P02T1G, PD Max (W)=0.4, Qrr Typ (nC)=8, RoHS=Pb-Free, V(BR)DSS Min (V)=20, VGS Max (V)=20, VGS(th) Max (V)=2.3
Q2: library part CMP-1058-00767-1, "Power MOSFET, 200 mA, 50 V, N-Channel, 3-Pin SOT-23, Pb-Free, Tape and Reel", Manufacturer="On Semiconductor", Package Type=SOT-23-3, Channel Polarity="N Channel", Ciss Typ (pF)=40, ComponentLink1Description="Manufacturer URL", ComponentLink1URL=http://www.onsemi.com/, ComponentLink2Description=Datasheet, ComponentLink2URL=http://www.onsemi.com/pub_link/Collateral/BSS138LT1-D.PDF, ComponentLink3Description="Package Specification", ComponentLink3URL=http://www.onsemi.cn/pub_link/Collateral/318-08.PDF, Configuration=Single, Coss Typ (pF)=12, Crss Typ (pF)=3.5, DatasheetVersion="Rev. 8", ID Max (A)=0.2, Mounting Technology="Surface Mount", PackageDescription="3-Pin Small Outline Transistor, Body 2.92 x 1.3 mm, Pitch 0.95 mm", PackageReference=SOT-23-3-318-08, PackageVersion="Rev. AP, 11/2009", Packing="Tape and Reel", PartNumber=BSS138LT1G, PD Max (W)=0.225, RoHS=Pb-Free, V(BR)DSS Min (V)=50, VGS Max (V)=20, VGS(th) Max (V)=1.5
Q3 Q4 Q5 Q6 Q7: library part CMP-32901-000179-1, "MOSFET N-CH 20V 1.2A SOT-23", Case/Package=SOT-23, Continuous Drain Current (ID)=1.2A, Drain to Source Breakdown Voltage=20V, Drain to Source Resistance=350mR, Gate to Source Voltage (Vgs)=12V, Input Capacitance=110pF, Max Operating Temperature=150°C, Max Power Dissipation=540mW, Min Operating Temperature=-55°C, Power Dissipation=540W, Threshold Voltage=700mV, Contact Plating=Tin, Drain to Source Voltage (Vdss)=20V, Element Configuration=Single, Halogen Free="Halogen Free", Height=0.04inch, Lead Free="Lead Free", Length=0.119inch, Max Dual Supply Voltage=20V, Mount="Surface Mount", Number of Pins=3, Packaging="Tape and Reel", Rds On Max=250mR, REACH SVHC="No SVHC", Rise Time=9.5ns, Turn-Off Delay Time=9.7ns, Turn-On Delay Time=2.5ns, Width=0.055inch
R1 R2 R3 R4 R5 R8 R9 R10 R13 R15 R16 R17 R18 R20 R21 R23 R27 R28 R29 R30 R31 R32 R33 R34 R35 R36 R37 R38 R39 R40 R41 R42 R43 R44 R45 R47 R48: library part Res2, "Resistor", LatestRevisionDate=17-Jul-2002, LatestRevisionNote="Re-released for DXP Platform.", PackageDescription="Axial Device, Thru-Hole; 2 Leads; 0.4 in Pin Spacing", PackageReference=AXIAL-0.4, Published=8-Jun-2000, Publisher="Altium Limited"
R6 R7 R11 R12: library part Res3, "Resistor", LatestRevisionDate=29-May-2009, LatestRevisionNote="IPC-7351 Footprint Added.", PackageDescription="Chip Resistor", PackageReference=J1-0603, Published=8-Jun-2000, Publisher="Altium Limited"
R14: library part CMP-2001-00479-1, Manufacturer=Panasonic, Part Number=ERJ-P06J104V
R19 R26: library part CMP-2001-00528-1, Manufacturer=Panasonic, Part Number=ERJ6ENF2703V
R22: library part CMP-2001-04376-1, Manufacturer=Panasonic, Part Number=ERJ-6ENF1002V
R24: library part CMP-1013-00510-2, Manufacturer="Vishay Dale", Part Number=CRCW08051K00FKEA
R25: library part CMP-2001-04723-1, Manufacturer="Vishay Dale", Part Number=TNPW0805100RBEEA
S1: library part CMP-07421-000062-1, "ROTARY ENCODER MECHANICAL 24PPR", Max Operating Temperature=70°C, Min Operating Temperature=-30°C, Package Quantity=75, Built in Switch=Yes, Detent=Yes, Encoder Type=Mechanical, Height=13.4mm, Hole Diameter=2.1mm, Length=26mm, Mount="Through Hole", Number of Channels=2, Orientation="Right Angle", Output Type=Quadrature, Packaging=Bulk, Pulses per Revolution=24, RoHS Compliant=Yes, Series=PEC12R, Termination="PC Pin", Width=12.5mm
SW1: library part CMP-1452-00013-1, "WS-TASV SMD Tact Switch 6X6 mm", Manufacturer="Wuerth Elektronik", ComponentLink1Description="Manufacturer URL", ComponentLink1URL=http://www.we-online.com, ComponentLink2Description=Datasheet, ComponentLink2URL=http://katalog.we-online.de/em/datasheet/4301x2.pdf, NoPins=04, PackageReference=430182043816, PartNumber=430182043816
U1: "Charger IC Lithium Ion/Polymer 20-QFN _4x4_", Package="QFN-20 Microchip", Digi-Key_Part_Number=MCP73871T-2CCI/MLCT-ND, Digi-Key_Purchase_URL=https://www.digikey.com/product-detail/en/microchip-technology/MCP73871T-2CCI-ML/MCP73871T-2CCI-MLCT-ND/7065594?utm_source=snapeda&utm_medium=aggregator&utm_campaign=symbol, MF=Microchip, MP=MCP73871T-2CCI/ML, SnapEDA_Link=https://www.snapeda.com/parts/MCP73871T-2CCI/ML/Microchip/view-part/1049920/?ref=snap
U2: library part CMP-0967-00141-1, "USB-to-UART Bridge Controller, 3 to 5.25 V, 0 to 70 degC, 28-Pin SSOP (PVX28), Tape and Reel", Manufacturer=Cypress, Max. Operating Temp. (degreesC)=70, Max. Operating Voltage (V)=5.25, Min. Operating Temp. (degreesC)=0, Min. Operating Voltage (V)=3, ComponentLink1Description="Manufacturer URL", ComponentLink1URL=http://www.cypress.com/, ComponentLink2Description=Datasheet, ComponentLink2URL=http://www.cypress.com/?docID=48153, ComponentLink3Description="Package Specification", ComponentLink3URL=http://www.cypress.com/?docID=1371, DatasheetVersion="Rev. *D", Memory Architecture=Flash, Mounting Technology="Surface Mount", PackageDescription="28-Pin Super Small Outline Package, Body 10.2 x 5.3 mm, Pitch 0.65 mm", PackageReference=PVX28, PackageVersion="Rev. *C, 10/2001", Packing="Tape and Reel", PartNumber=CY7C64225-28PVXCT, RoHS=Pb-Free
U?: library part CMP-0048-00493-1, "32-bit Microcontroller with Audio and Graphics Interface, USB and Advanced Analog, 40 MHz, 34 I/O, PMP, -40 to 85 degC, 44-pin TQFP (PT44), Tray", Manufacturer=Microchip, ComponentLink1Description="Manufacturer URL", ComponentLink1URL=http://www.microchip.com, ComponentLink2Description=Datasheet, ComponentLink2URL=http://ww1.microchip.com/downloads/en/DeviceDoc/61168E.pdf, ComponentLink3Description="Package Specification", ComponentLink3URL=http://www.microchip.com/stellent/groups/techpub_sg/documents/packagingspec/en012702.pdf, ComponentLink4Description="Product URL", ComponentLink4URL=http://www.microchip.com/PIC32MX130F064D, DatasheetVersion="Rev. E", Mounting Technology="Surface Mount", PackageDescription="44-Lead Plastic Thin Quad Flatpack, 10 x 10 mm Body, 0.8 mm Pitch", PackageReference=TQFP-PT44, PackageVersion=C04-076B, PartNumber=PIC32MX130F064D-I/PT
VR1: "1 kOhms 0.5W, 1/2W PC Pins Through Hole Trimmer Potentiometer Cermet 1 Turn Top Adjustment", Package="3116 Bourns", Availability=Warning, Check_prices=https://www.snapeda.com/parts/3362P-1-102LF/Bourns/view-part/468358/?ref=eda, MF=Bourns, MP=3362P-1-102LF, Price=None, Purchase-URL=https://pricing.snapeda.com/search/part/3362P-1-102LF/?ref=eda, SnapEDA_Link=https://www.snapeda.com/parts/3362P-1-102LF/Bourns/view-part/468358/?ref=snap
X1: library part "USB-C Type 2.0", "U262-161N-4BVC11 /  XKB Connectivity", Supplier Part Number 1=C319148, ComponentLink1Description="LCSC  C319148", ComponentLink1URL=https://lcsc.com/product-detail/USB-Connectors_XKB-Connectivity-U262-161N-4BVC11_C319148.html, Supplier 1=LCSC
Y1: library part CMP-1749-00001-1, "Resistance Weld SMD Crystal, 8 MHz, +/- 30 ppm, 12 pF, -20 to 70 degC, 2-Pin SMD, RoHS, Tape and Reel", Case\Package=SOT-553-6, Max Operating Temperature="150 degC", Max Supply Voltage="3.3 V", Max Supply Voltage (DC)="6 V", Min Operating Temperature="-55 degC", Min Supply Voltage="1.4 V", Min Supply Voltage (DC)="4 V", Output Current="3 mA", Package Quantity=1, ComponentLink1Description="Manufacturer URL", ComponentLink1URL=http://www.foxonline.com/, ComponentLink2Description=Datasheet, ComponentLink2URL=http://foxonline.com/pdfs/hc49sdlf.pdf, DatasheetVersion=Mar-15, Height="0.55 mm", Interface=I2C, Length="1.6 mm", Mount="Surface Mount", PackageDescription="2-Pin Surface Mount Device, Body 5 x 11.7 mm, Height 4.5 mm", PackageReference=FOX-FOXSDLF160-20, Packaging="Cut Tape", Pins=6, Radiation Hardening=No, REACH SVHC="No SVHC", RoHSCompliant=true, Weight="9.9E-05 oz", Width="1.2 mm"

## Free pads (board coordinates)
  round 3.2 hole 3.2: M3(3.81,4.51) M3(3.81,78.74) M3(121.158,4.51) M3(121.179,78.74)

## Via types
v1: diameter 0.61, hole 0.25, Top Layer to Bottom Layer, 62 vias
v2: diameter 0.65, hole 0.3, Top Layer to Bottom Layer, 39 vias
v3: diameter 0.75, hole 0.35, Top Layer to Bottom Layer, 14 vias

## Nets (pads, with @x,y where several pads share a name; then routed paths per layer and width w, separated by ;. In a path a pad name is that pad's centre, name@x,y a point inside that pad or via, vN(x,y) a via of type N, cw(c..) or ccw(c..) an arc to the next point about the centre after c; other vN are vias at no path point)
+3.3V: +3.3V.1 C5.1 C10.1 C11.1 C13.1 D4.3 D6.2 LS1.P P1.2 P3.2 R14.1 R22.2 R28.2 R29.2 R30.2 R31.2 R32.2 R34.1 R35.1 R36.1 R38.2 R41.1 R42.1 R43.1 R45.2 U2.16 U2.28 U3.12 U3.13 U3.14 U3.15 U?.17 U?.28 U?.40 VR1.3 | length 437.8
  Top Layer w0.254: v1(67.2,27.15) 67.2,24.707 76.598,15.309 95.8,15.309 98.128,17.637 v1(107.1,17.637) ; 110,37.936 110.084,38.02 D6.2 R22.2
  Top Layer w0.3: U2.28 12.4,28.281 12.4,27.2 ; v1(16.103,36.751) 15.51,36.157 U2.16 10.979,36.157 10.329,35.507 4.038,35.507 2.7,34.169 2.7,28.084 3.584,27.2 12.4,27.2 ; v1(26.3,38.6) 33.386,38.6 R36.1 R35.1 R34.1 33.666,43.59 35.976,45.9 67.7,45.9 68.5,46.7 68.505,46.7 71.602,49.797 +3.3V.1 R14.1 76.682,49.007 78.46,47.229 80.276,47.229 80.888,47.841 80.888,48.744 U3.12 U3.13 U3.14 U3.15 82.876,47.624 84.2,46.3 C5.1 87.672,46.3 ; R32.2 R31.2 R30.2 16.91,13.79 12.4,18.3 12.4,27.2 ; v1(52.7,36.5) 54.028,36.5 C13.1 ; C13.1@54.296,36.582 54.405,36.473 54.405,35.237 54.8,34.842 U?.40@54.8,33.392 ; U?.17@55.6,21.992 55.6,20.834 56.108,20.326 56.108,18.84 C11.1 59.915,18.694 ; R38.2 R29.2 R28.2 ; R38.2@60.009,12.859 60.009,18.6 59.915,18.694 ; U?.28@61.3,27.692 63.51,27.692 64.052,27.15 v1(67.2,27.15) ; v1(65.2,18.6) 65.141,18.659 64.921,18.659 64.887,18.694 59.915,18.694 ; v1(107.1,17.637) 110.116,17.637 R45.2 ; LS1.P 115.322,71.114 115.322,78.037 113.195,80.164 D4.3 107.022,80.164 104.208,77.35 104.208,65.908 87.672,49.372 87.672,46.3 ; P3.2 114.735,37.936 110,37.936 VR1.3 107.187,39.388 R41.1 R42.1 R43.1 91.248,46.052 91,46.3 87.672,46.3
  Bottom Layer w0.254: P1.2 97.14,8.4 103.401,8.4 107.1,12.1 v1(107.1,17.637)
  Bottom Layer w0.3: v1(16.103,36.751) 17.953,38.6 v1(26.3,38.6) 26.3,37.2 28.942,34.558 52.61,34.558 ; 44.664,24.016 44.702,24.053 45.094,24.053 52.7,31.66 v1(52.7,36.5) ; v1(65.2,18.6) 65.2,25.15 v1(67.2,27.15) ; v1(107.1,17.637) 107.1,36.397 VR1.3
BAT_LVL: BAT_LVL.1 R12.1 U?.36 | length 34.4
  Top Layer w0.254: R12.1 58.868,54.817 BAT_LVL.1@59.156,54.529 ; v1(57.99,34.99) 57.995,34.985 57.995,33.397 U?.36@58,33.392 ; BAT_LVL.1 59.41,52.235 v1(59.99,51.655)
  Bottom Layer w0.254: v1(57.99,34.99) 58.003,34.99 66.083,43.07 66.083,51.017 65.445,51.655 v1(59.99,51.655)
BAT_READ: R6.1 R11.2 U?.5 | length 33.9
  Top Layer w0.254: U?.5@49.9,28.492 49.954,28.546 52.246,28.546 v1(52.3,28.6) ; R11.2@62.966,52.901 R11.2 R6.1 v1(64.93,50.465)
  Bottom Layer w0.254: v1(52.3,28.6) 53.3,29.6 53.3,32.824 64.93,44.454 v1(64.93,50.465)
D+: R16.1 X1.A6 X1.B6 | length 17.5
  Top Layer w0.254: X1.B6 8.972,52.46 9.121,52.609 9.121,52.898 ; X1.A6 8.972,53.46 9.121,53.311 9.121,52.898 ; v1(11.912,52.91) 9.133,52.91 9.121,52.898 ; v1(16.103,44.989) 16.103,43.502 R16.1
  Bottom Layer w0.254: v1(11.912,52.91) 16.103,48.718 v1(16.103,44.989)
D-: R15.1 X1.A7 X1.B7 | length 17.5
  Top Layer w0.254: X1.A7 6.515,52.96 6.237,53.238 6.237,53.664 6.533,53.96 9.424,53.96 9.53,53.854 v1(9.626,53.854) ; R15.1 v1(13.182,44.989)
  Bottom Layer w0.254: v1(9.626,53.854) 13.182,50.298 v1(13.182,44.989)
GND: BT1.1 C1.1 C2.1 C3.1 C4.2 C5.2 C6.1 C7.1 C8.2 C9.2 C10.2 C11.2 C13.2 D5.2 D7.2 D8.9 D9.9 GND1.1 GND.1 P1.3 P2.4 P3.1 Q2.2 Q3.2 Q4.2 Q5.2 Q6.2 Q7.3 R1.1 R2.1 R8.1 R9.1 R10.1 R11.1 R17.1 R18.1 R23.2 R33.2 R39.2 R44.2 R48.2 S1.2 S1.C SW1.1 SW1.3 U1.3 U1.9 U1.10 U1.11 U1.21 U2.1 U2.13 U3.10 U3.11 U?.6 U?.16 U?.29 U?.39 VR1.1 X1.A1B12 X1.B1A12 | length 761
  Top Layer w0.254: R2.1@3.107,43.944 R2.1 R1.1 7.422,43.944 ; X1.A1B12@7.485,56.533 X1.A1B12@7.658,56.36 ; X1.B1A12@7.658,49.96 7.683,49.935 8.465,49.935 8.7,49.7 8.7,47.838 7.422,46.56 7.422,43.944 ; BT1.1 11.689,71.882 20.472,71.882 33.606,58.748 R8.1 33.771,58.763 v1(41.63,58.763) ; U2.1 17.958,28.357 17.2,29.115 17.2,35.566 17.791,36.157 U2.13 20.758,36.157 20.907,36.306 20.907,36.314 21.056,36.463 21.056,39.122 20.296,39.882 18.618,39.882 17.5,41 17.5,42.424 ; R17.1@22.359,43.533 27.092,48.266 33.212,48.266 R9.1 ; Q5.2 34.511,28.384 36.219,30.092 41.878,30.092 ; Q4.2 35.2,33.656 37.701,36.157 42.785,36.157 42.934,36.008 R33.2 42.885,34.451 42.885,33.518 41.878,32.511 41.878,30.092 ; Q6.2 35.743,22.8 37.583,24.641 41.878,24.641 ; U1.9 U1.10 ; U1.11 U1.21@36.566,52.013 ; v3(36.677,52.124) U1.21@36.566,52.013 ; v3(37.566,53.013) U1.3 ; C2.1 v1(41.63,58.763) ; D8.9 41.315,40.315 41.315,38.329 40.838,37.852 28.252,37.852 27.8,37.4 25.558,37.4 24.358,38.6 24.358,41.534 22.434,43.458 R17.1 21.174,43.458 20.14,42.424 17.5,42.424 ; R39.2 42.785,26.633 41.878,26.633 ; R10.1 49.362,50.638 v2(50,50) ; U?.6@49.9,27.692 48.793,27.692 47.362,29.122 46.508,29.122 C8.2 44.549,29.25 43.707,30.092 41.878,30.092 ; Q2.2 50.821,49.179 v2(50,50) ; C11.2 v1(54.154,17.1) 54.154,15.942 58.273,11.823 63.897,11.823 ; C11.2@54.3,18.694 54.3,20.334 54.8,20.834 U?.16@54.8,21.992 ; C13.2 57.886,36.582 58.104,36.8 v1(58.2,36.8) ; C13.2@56.325,36.074 55.966,36.074 55.851,35.959 55.851,35.6 55.6,35.349 55.6,32.279 55.749,32.13 59.387,28.492 61.3,28.492 62.966,28.492 63.361,28.887 64.889,28.887 C10.2 65.302,29.2 v1(67.2,29.2) ; S1.C@62.5,3.2 65,5.7 65,8.403 63.897,9.506 63.897,11.823 ; R11.1 71.418,54.817 74.503,51.732 v3(80.251,51.732) ; v1(77.5,28.546) C7.1@79.415,28.546 ; v1@78.442,59.932 77.273,58.763 v1(41.63,58.763) ; v1(78.46,59.95) 82.391,59.95 ; C7.1 79.482,23.196 92.061,23.196 ; U3.10@79.626,48.782 U3.11 80.276,50.707 v3(80.251,50.732) ; v3(82.251,50.732) 82.391,50.872 C4.2 C5.2 ; D9.9 83,40 86,37 105,37 ; C3.1 82.391,59.95 ; v1(91.6,15.9) 91.6,17.223 GND.1 92.061,23.196 ; P1.3 v1(91.7,12.2) ; v1(92,26.8) 92.061,26.739 92.061,23.196 ; v1(93.9,30.2) 95.559,30.2 D5.2 95.562,30.2 v1(97.1,30.2) ; v1(100.9,30.2) 104.978,30.2 ; Q7.3 104.831,27.522 104.978,27.669 104.978,30.2 ; C9.2 C9.2@110.234,54.679 ; R48.2 110,28.769 110,31.495 VR1.1 105,32.856 104.978,32.878 ; Q3.2 R23.2 ; 7.422,43.944 9.217,43.944 C1.1 9.222,42.424 ; 9.222,42.424 17.5,42.424 ; 9.222,42.424 R18.1 4.332,36.582 2,34.25 2,27.833 8.2,21.633 8.2,9.1 15.2,2.1 33.861,2.1 34.358,2.597 P2.4 46.58,5.086 ; R9.1 33.568,48.418 33.568,47.538 33.877,47.229 47.229,47.229 v2(50,50) ; R9.1 33.466,50.905 34.574,52.013 U1.10 ; U1.10 U1.21@36.566,52.013 ; 41.878,24.641 41.878,26.633 ; 41.878,24.641 41.878,21.569 42.027,21.421 42.348,21.421 42.821,20.948 R44.2 42.821,20.984 43.294,21.457 43.444,21.457 44.201,22.214 46.38,22.214 46.38,19.668 43.585,16.873 43.585,9.434 45.294,7.725 D7.2 46.58,5.086 ; 41.878,26.633 41.878,30.092 ; 46.58,5.086 46.58,1.896 46.976,1.5 70.9,1.5 72.6,3.2 72.6,9 69.777,11.823 63.897,11.823 ; 82.391,59.95 82.524,60.083 82.524,76.834 87.49,81.8 114,81.8 116.258,79.542 116.258,75.142 117.8,73.6 117.8,62.366 117.353,61.919 113.681,61.919 112.768,62.832 112.102,62.832 R23.2 ; 104.978,30.2 104.978,32.878 ; 104.978,32.878 104.978,36.978 105,37 ; 105,37 113.131,37 P3.1 117.931,32.2 119.955,32.2 123.92,36.165 123.92,53.706 123.018,54.609 SW1.1 113.659,54.679 C9.2@110.234,54.679 ; C9.2@110.234,54.679 110.5,54.944 110.5,61.919 110.714,62.133 110.714,62.162 111.104,62.552 111.49,62.552 R23.2
  Bottom Layer w0.254: v3(38.455,53.902) 41.63,57.077 v1(41.63,58.763) ; v1(67.2,29.2) 67.854,28.546 v1(77.5,28.546) ; v1(78.46,59.95) 79.828,58.582 79.828,53.155 v3(80.251,52.732) ; v1(91.6,15.9) 91.65,15.85 91.65,12.25 v1(91.7,12.2) ; v1(92,26.8) 93.9,28.7 v1(93.9,30.2) ; v1(97.1,30.2) v1(100.9,30.2)
  other v2: 10,10 20,10 40,10 80,10 90,10 100,10 110,10 15,20 85,20 95,20 105,20 40,30 110,30 15,40 25,40 115,40 30,50 60,50 70,50 90,50 100,50 15,60 25,60 35,60 45,60 55,60 65,60 75,60 95,60 105,60 115,60 20,70 30,70 40,70 50,70 70,70 80,70 110,70
  other v3: 81.251,50.732 81.251,51.732 82.251,51.732 38.455,52.124 81.251,52.732 82.251,52.732 36.677,53.902
LCD_BL: R47.2 U?.44 | length 71.1
  Top Layer w0.254: U?.44@51.6,33.392 51.6,34.9 51,35.5 51,37.4 52.2,38.6 60.32,38.6 62.338,36.582 92.918,36.582 108.362,21.138 R47.2
LCD_DB4: P3.11 U?.24 | length 75.4
  Top Layer w0.254: U?.24@61.3,24.492 63.066,24.492 64.93,22.628 68.706,22.628 76.741,14.593 120.392,14.593 121.108,15.309 121.108,21.224 120.272,22.059 118.163,22.059 P3.11
LCD_DB5: P3.12 U?.33 | length 70.5
  Top Layer w0.254: U?.33@61.3,31.692 69.892,31.692 72.1,33.9 78.132,33.9 83.748,28.284 99.416,28.284 109.01,18.69 114.11,18.69 115.667,17.133 119.794,17.133 120.298,17.637 120.298,19.673 P3.12
LCD_DB6: P3.13 U?.41 | length 78.1
  Top Layer w0.254: U?.41@54,33.392 53.974,33.418 53.974,34.816 53.8,34.99 53.142,34.99 52,36.132 52,37.1 52.69,37.79 59.61,37.79 61.628,35.772 92.528,35.772 109.205,19.095 114.278,19.095 115.249,18.124 P3.13
LCD_DB7: P3.14 U?.43 | length 80.8
  Top Layer w0.254: U?.43@52.4,33.392 52.4,34.89 51.5,35.79 51.5,37.327 52.368,38.195 59.984,38.195 62.002,36.177 92.696,36.177 109.373,19.5 114.446,19.5 114.751,19.195 118.236,19.195 P3.14
LCD_E: P3.6 U?.23 | length 78.9
  Top Layer w0.254: U?.23@61.672,23.692 61.672,22.628 62.115,22.185 68.576,22.185 76.573,14.188 120.56,14.188 121.513,15.141 121.513,26.078 P3.6
LCD_RS: P3.4 U?.21 | length 85.3
  Top Layer w0.254: U?.21@58.8,21.992 58.8,21.517 59.353,20.964 68.652,20.964 76.316,13.3 120.9,13.3 122.323,14.723 122.323,27.808 P3.4
LCD_RW: P3.5 U?.22 | length 85
  Top Layer w0.254: U?.22@59.6,21.992 59.6,21.76 59.76,21.6 68.589,21.6 76.484,13.705 120.649,13.705 121.918,14.973 121.918,27.074 119.717,29.274 117.758,29.274 P3.5
LED_B: R40.2 U?.9 | length 7.9
  Top Layer w0.254: R40.2 42.821,23.599 43.294,24.072 43.444,24.072 44.664,25.292 U?.9@49.9,25.292
LED_Debug: R19.2 U?.35 | length 31.9
  Top Layer w0.254: U?.35@58.8,33.392 58.8,34.99 59.177,35.367 81.556,35.367 86.098,30.824 86.248,30.824 86.721,30.351 R19.2
LED_G: R37.2 U?.8 | length 9.1
  Top Layer w0.254: R37.2 44.275,28.77 44.424,28.622 44.424,26.854 45.186,26.092 U?.8@49.9,26.092
LED_R: R27.2 U?.1 | length 7
  Top Layer w0.254: R27.2 U?.1@49.9,31.692
LED_Vie: R26.2 U?.10 | length 9.6
  Top Layer w0.254: R26.2 46.58,17.614 47.9,18.934 v1(47.9,19) ; v1(47.9,20.984) 47.9,22.967 49.425,24.492 U?.10
  Bottom Layer w0.254: v1(47.9,19) v1(47.9,20.984)
MCLR: P1.1 R24.2 U?.18 | length 97.3
  Top Layer w0.254: U?.18@56.4,21.992 56.4,20.684 57.899,19.185 66.051,19.185 81.241,3.995 88.598,3.995 88.599,3.996 95.276,3.996 P1.1 102.2,10.92 v1(102.2,12.2) ; v1(102.2,49.3) 104.198,49.3 R24.2
  Bottom Layer w0.254: v1(102.2,12.2) v1(102.2,49.3)
NetBT1_2: BT1.2 C3.2 Q1.2 R7.2 U1.14 U1.15 U1.16 Vbat.1 | length 92
  Top Layer w0.254: U1.14 U1.15 39.011,51.013 39.566,51.568 U1.16 44.107,52.013 50.452,58.358 52.298,58.358 ; R7.2@52.298,54.817 52.33,54.785 53.28,54.785 54.298,53.767 56.362,53.767 57.632,52.497 57.632,52.491 58.124,51.999 Q1.2 ; R7.2 52.298,58.358 ; BT1.2@90.995,71.882 90.995,67.211 ; Vbat.1 100.473,67.211 90.995,67.211 ; 52.298,58.358 87.195,58.358 87.6,58.763 87.6,59.878 C3.2 90.05,59.95 90.995,60.896 90.995,67.211
NetC2_2: C2.2 J1.1 U1.1 U1.20 Vcc.1 | length 78.6
  Top Layer w0.254: U1.1@38.566,55.009 39.089,55.009 39.566,54.532 U1.20 41.315,54.013 C2.2@41.63,54.328 ; C2.2 v1(43.662,54.04) ; Vcc.1 J1.1
  Bottom Layer w0.254: v1(43.662,54.04) 66.456,76.834 J1.1
NetC4_1: C4.1 U3.3 | length 7
  Top Layer w0.254: U3.3 82.226,55.688 82.524,55.986 84.81,55.986 85.572,55.224 C4.1
NetC8_1: C8.1 U?.7 | length 3.6
  Top Layer w0.254: C8.1 46.638,26.892 U?.7@49.9,26.892
NetC9_1: C9.1 D6.1 R22.1 R24.1 R25.2 | length 19.1
  Top Layer w0.254: R24.1 110.072,49.311 D6.1 ; C9.1 D6.1 ; R25.2 R22.1 116.468,47.418 115.084,48.803 110.604,48.803 D6.1
NetD1_2: D1.2 R5.1 | length 4.7
  Top Layer w0.254: D1.2@18.111,50.284 R5.1
NetD2_2: D2.2 R4.2 | length 4.8
  Top Layer w0.254: D2.2 R4.2@22.88,53.593
NetD3_2: D3.2 R3.1 | length 4.7
  Top Layer w0.254: D3.2 R3.1@22.8,56.828
NetD4_1: D4.1 LS1.N R20.1 | length 18.5
  Top Layer w0.254: D4.1@110.899,79.201 D4.1 R20.1 112.541,75.755 113.729,74.566 113.729,65.946 115.277,64.398 115.277,63.959 LS1.N
NetD5_1: D5.1 R19.1 | length 2.9
  Top Layer w0.254: R19.1@89.148,30.201 D5.1
NetD7_1: D7.1 R26.1 | length 3.3
  Top Layer w0.254: D7.1 R26.1
NetD8_1: D8.1 R36.2 | length 4.2
  Top Layer w0.254: R36.2 37.435,38.88 37.665,39.11 D8.1
NetD8_2: D8.2 R35.2 | length 4.4
  Top Layer w0.254: R35.2 35.896,41 37.058,41 37.688,40.37 D8.2
NetD8_3: D8.3 R34.2 | length 5.1
  Top Layer w0.254: R34.2@35.877,43.33 R34.2 35.829,43.502 36.566,43.502 38.438,41.63 D8.3
NetD8_6: D8.6 D9.6 LED_B.1 Q6.3 | length 79.4
  Top Layer w0.254: v1(29.6,35.5) 29.6,27.928 32.26,25.269 Q6.3 ; D8.6 44.21,41.7 v1(52.7,41.7) ; v1(58.5,39.5) 60.718,39.5 61.618,38.6 LED_B.1 67.7,38.6 69.47,40.37 D9.6
  Bottom Layer w0.254: v1(29.6,35.5) 46.5,35.5 v1(52.7,41.7) 56.6,41.7 58.432,39.868 58.432,39.568 v1(58.5,39.5)
NetD8_7: D8.7 D9.7 LED_G.1 Q5.3 | length 64.3
  Top Layer w0.254: v1(31.2,36.5) 30.6,35.9 30.6,30.164 32.24,28.524 Q5.3 ; D8.7 v1(46.638,40.37) 60.77,40.37 61.8,41.4 LED_G.1 64.93,41.63 D9.7
  Bottom Layer w0.254: v1(31.2,36.5) 42.768,36.5 v1(46.638,40.37)
NetD8_8: D8.8 D9.8 LED_R.1 Q4.3 | length 56.3
  Top Layer w0.254: Q4.3 32.24,35.551 33.789,37.1 43.362,37.1 44.14,37.878 D8.8 44.15,39.1 v1(48.7,39.1) ; v1(60.5,44.2) 68.3,44.2 69.61,42.89 D9.8
  Bottom Layer w0.254: v1(48.7,39.1) 53.8,44.2 v1(60.5,44.2)
NetD9_1: D9.1 R43.2 | length 4.3
  Top Layer w0.254: D9.1 87.384,42.89 87.926,43.432 R43.2 R43.2@89.128,43.412
NetD9_2: D9.2 R42.2 | length 4.1
  Top Layer w0.254: D9.2 87.37,41.63 87.6,41.4 R42.2
NetD9_3: D9.3 R41.2 | length 4.4
  Top Layer w0.254: D9.3 86.944,40.37 87.926,39.388 R41.2
NetP3_3: P3.3 VR1.2 | length 12.6
  Top Layer w0.254: VR1.2 112.195,35.396 P3.3
NetP3_15: P3.15 R45.1 | length 6.6
  Top Layer w0.254: R45.1 P3.15
NetP3_16: P3.16 Q7.2 | length 28.1
  Top Layer w0.254: Q7.2 106.653,28.418 107.482,28.418 108.378,27.522 112.278,27.522 115.3,24.5 115.3,20.1 115.8,19.6 117.5,19.6 118,20.1 118,21.154 118.5,21.654 120.104,21.654 120.703,21.056 120.703,16.979 P3.16
NetQ1_1: Q1.1 Q2.3 R7.1 | length 11.3
  Top Layer w0.254: Q2.3 52.348,47.229 Q1.1 ; Q2.3@52.298,47.229 R7.1@52.298,52.717
NetQ1_3: Q1.3 R6.2 | length 6.9
  Top Layer w0.254: Q1.3 62.78,48.179 R6.2
NetQ2_1: Q2.1 R12.2 | length 4.4
  Top Layer w0.254: Q2.1 53.248,49.229 55.346,51.327 R12.2
NetQ3_1: Q3.1 R21.2 R23.1 | length 9.2
  Top Layer w0.254: R21.2 106.854,65.298 109.968,65.298 110.036,65.23 ; R23.1 110.036,63.198 110.036,65.23 ; Q3.1 110.036,65.23
NetQ3_3: Q3.3 R20.2 | length 3.3
  Top Layer w0.254: R20.2 110.986,73.555 Q3.3
NetQ4_1: Q4.1 R27.1 R33.1 | length 9.7
  Top Layer w0.254: Q4.1 40.77,31.756 R27.1 R33.1
NetQ5_1: Q5.1 R37.1 R39.1 | length 9.1
  Top Layer w0.254: Q5.1 R39.1 R37.1
NetQ6_1: Q6.1 R40.1 R44.1 | length 9.3
  Top Layer w0.254: Q6.1 34.096,20.834 R44.1 R40.1
NetQ7_1: Q7.1 R47.1 R48.1 | length 6.9
  Top Layer w0.254: Q7.1 110.097,26.572 R48.1 R47.1
NetR1_2: R1.2 X1.B5 | length 6.9
  Top Layer w0.254: R1.2 5.755,46.173 5.755,50.63 6.535,51.41 X1.B5@7.658,51.41
NetR2_2: R2.2 X1.A5 | length 11.3
  Top Layer w0.254: R2.2 3.257,47.231 5.118,49.092 5.118,53.593 5.985,54.46 X1.A5
NetR3_2: R3.2 U1.6 | length 11.9
  Top Layer w0.254: R3.2@24.98,56.828 25.173,57.021 25.261,56.933 25.763,56.933 28.683,54.013 U1.6
NetR4_1: R4.1 U1.7 | length 10.6
  Top Layer w0.254: R4.1@24.98,53.513 U1.7
NetR5_2: R5.2 U1.8 | length 11.8
  Top Layer w0.254: R5.2@24.912,50.284 26.074,50.284 28.803,53.013 U1.8